# Altium PCB BordPCB.PcbDoc
Units mil, origin at the board's own origin, x right, y up, seen from the top; angles counter-clockwise.
Board outline 4737.04 x 3032.29 mil, 2 copper layers (Top Layer, Bottom Layer); 94 components, 112 nets, 442 pads, 0 vias.
Unrouted connection lines stored in the file: 265.
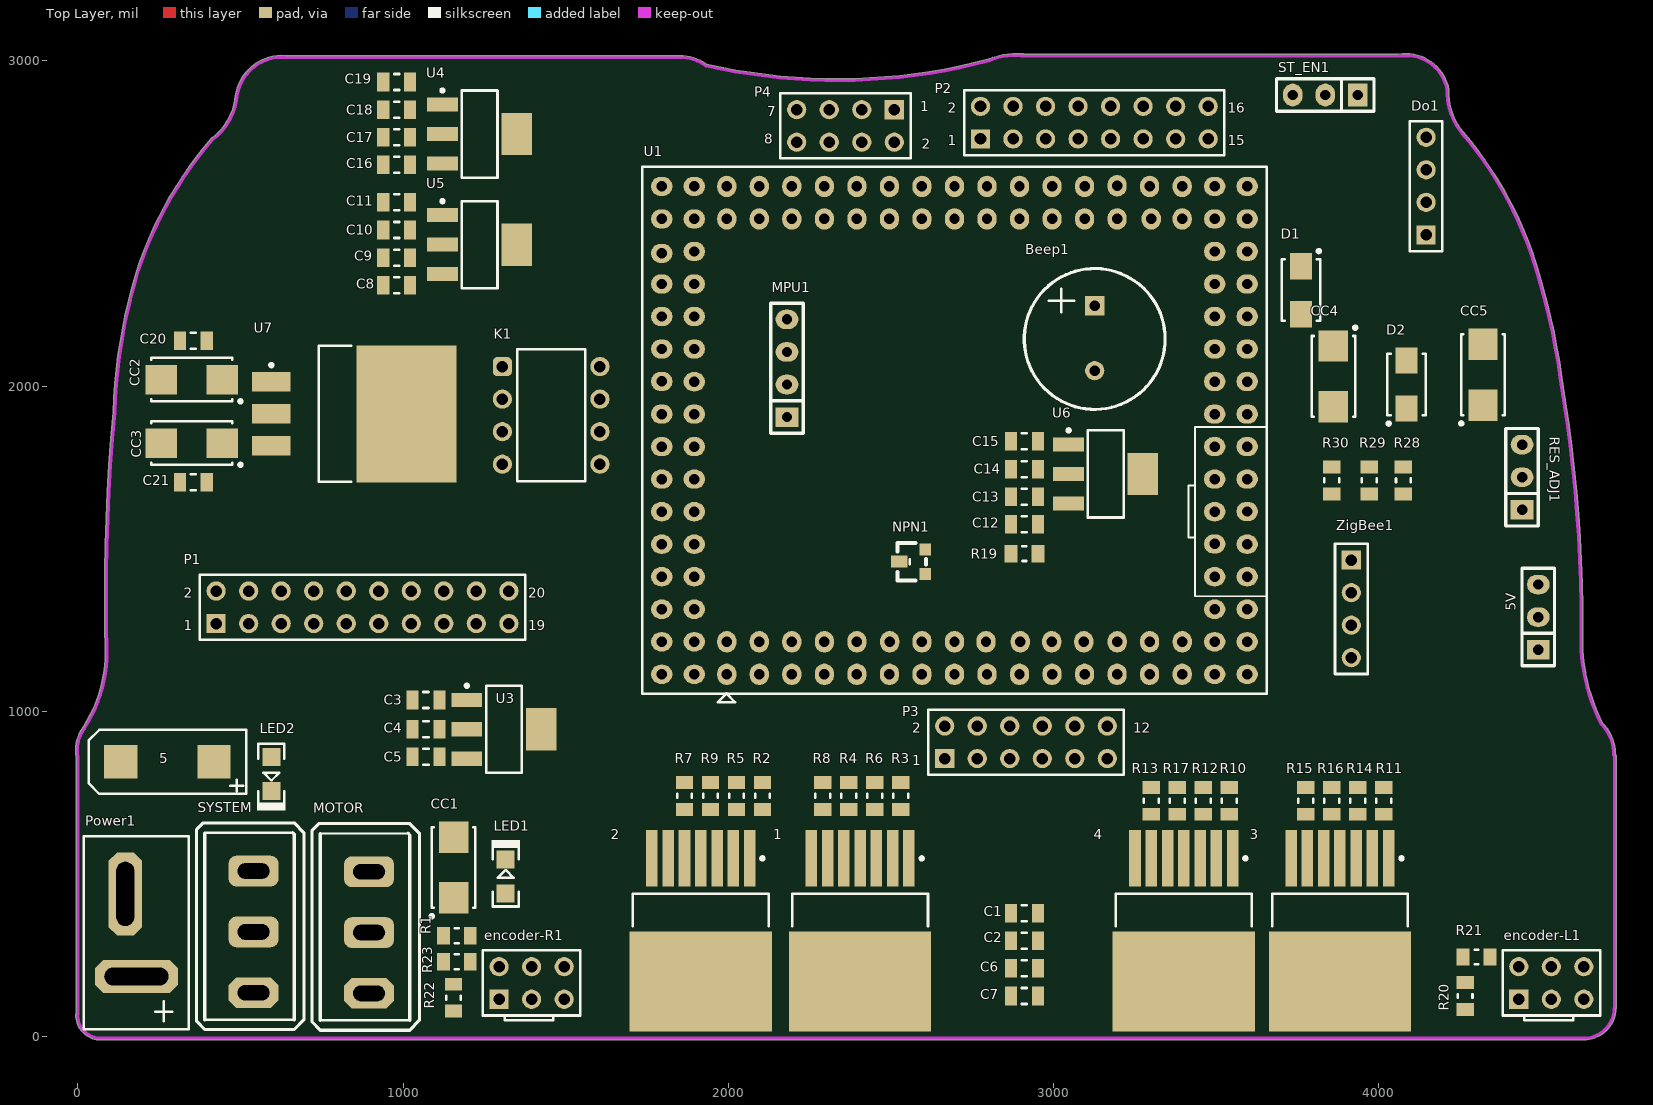
[diagram p0: Top Layer view]
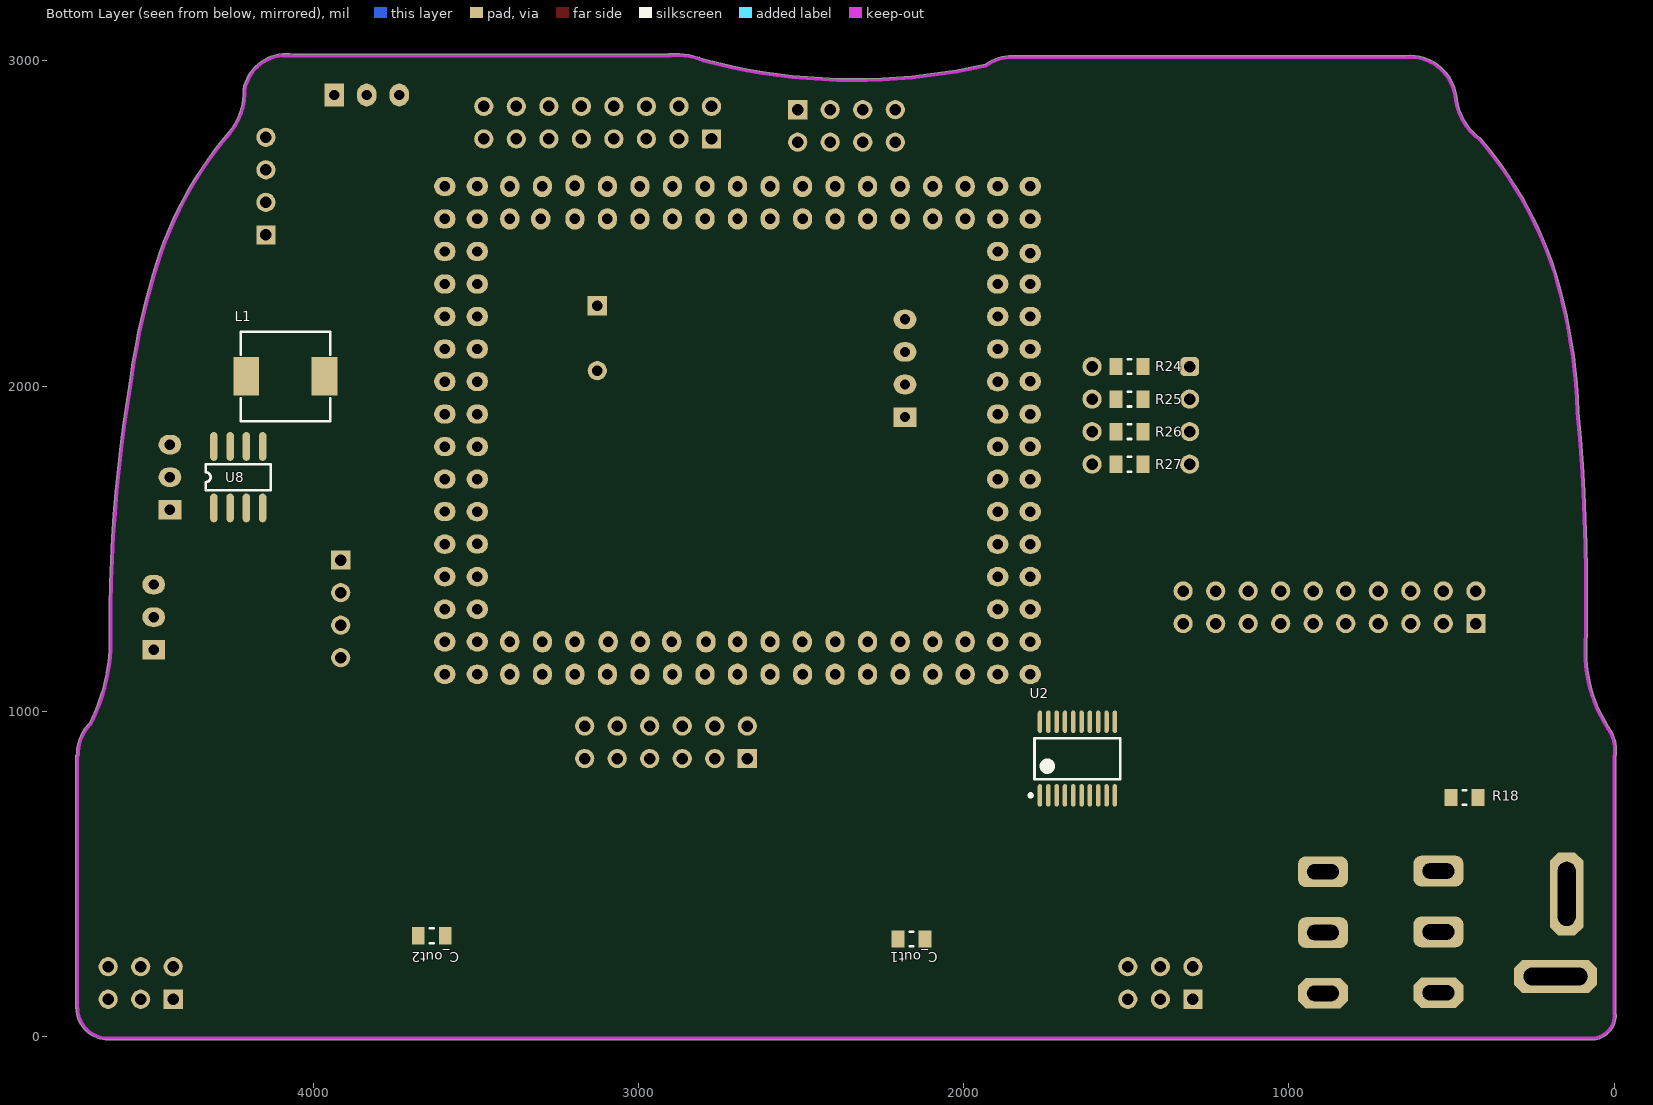
[diagram p1: Bottom Layer view, seen from below]

## Layer stack, top to bottom
Top Solder: solder mask 0.4, Solder Resist, Dk 3.5
Top Layer: signal copper 1.4
Dielectric 1: dielectric 12.6, FR-4, Dk 4.8
Bottom Layer: signal copper 1.4
Bottom Solder: solder mask 0.4, Solder Resist, Dk 3.5

## Board outline
-6.29,66.27 cw(c-1.27,66.27) -5.33,69.22 -5.33,859.52 cw(c115,880) 15,950 cw(c19.11,947.12) 15.98,951.04 ccw(c-348.3,1185.12) 84.71,1184.89 ccw(c-348.3,1185.12) 84.71,1184.96 84.71,1184.89 cw(c6354.82,1353.99) 107.98,1919.59 cw(c1810,1860) 178.76,2349.37 cw(c183.57,2347.93) 178.79,2349.47 cw(c1310,1985) 409.75,2760.9 cw(c413.55,2757.63) 410.58,2761.67 ccw(c300,2910) 484.18,2892.43 ccw(c300,2910) 484.18,2892.46 484.18,2892.43 cw(c489.17,2891.98) 484.22,2892.74 cw(c628.6,2870.58) 650.38,3015.01 1850.05,3015.01 cw(c1855,2885) 1932.28,2989.68 ccw(c2334.49,4768.1) 2798.37,3004.76 cw(c2885,2800) 2905.59,3021.37 cw(c2905.13,3016.38) 2908.58,3020.01 4059.56,3020.01 cw(c4082.5,2887.5) 4214.94,2910.87 cw(c4210,2910) 4215.02,2910 cw(c4210,2910) 4214.81,2908.57 ccw(c4410,2905) 4259.18,2781.03 ccw(c3380,2030) 4259.16,2781.07 4259.18,2781.03 cw(c3380,2030) 4492.37,2345.68 cw(c3380,2030) 4492.38,2345.63 4492.37,2345.68 cw(c2445,1730) 4562.25,2026.72 cw(c2445,1730) 4562.26,2026.65 4562.25,2026.72 cw(c-50,1250) 4627.19,1250 cw(c-50,1250) 4626.81,1189.93 ccw(c5185,1219.51) 4688.61,962.5 cw(c4595,870) 4726.6,870 cw(c4595,870) 4726.56,866.4 cw(c4725,861.63) 4730.02,861.63 4730.02,90 cw(c4725,90) 4728.19,86.13 cw(c4630,88.19) 4630,-10.01 70,-10.01 cw(c70,66.27)

## Design rules (kind name [scope] priority, off if disabled: settings)
Clearance [All] p1: gap=10 ignorepadtopadclearanceinfootprint=FALSE except(0: Arc-Hole Track-Hole SMDPad-Hole THPad-Hole Via-Hole Fill-Hole Poly-Hole Region-Hole Text-Hole)
PolygonConnect [All] p1: connectstyle=Relief reliefconductorwidth=10 reliefentries=4 polygonreliefangle="90 Angle" airgapwidth=10
RoutingVias [All] p1: holewidth=28 width=50 viastyle="Through Hole" minholewidth=28 minwidth=50 maxholewidth=28 maxwidth=50
SolderMaskExpansion [All] p1: expansion=4
Width [All] p1: maxlimit=10 minlimit=10 preferedwidth=10
30 further rules are at their usual default settings.

## Classes and differential pairs
net class PTB[19..0]: PTB0 PTB1 PTB2 PTB3 PTB4 PTB5 PTB6 PTB7 PTB8 PTB9 PTB10 PTB11 PTB16 PTB17 PTB18 PTB19
net class D[7..0]: D0 D1 D2 D3 D4 D5 D6 D7
component class U_ServoPower: CC4 CC5 D1 D2 L1 R28 R29 R30 RES_ADJ1 ST_EN1 U8
component class U_Select&Measure: encoder-L1 encoder-R1 K1 R20 R21 R22 R23 R24 R25 R26 R27
component class U_PowerGroup: 5 C8 C9 C10 C11 C12 C13 C14 C15 C16 C17 C18 C19 C20 C21 CC2 CC3 LED2 Power1 R18 R19 SYSTEM U4 U5 U6 U7
component class U_PowerDriver: 1 2 3 4 C1 C2 C3 C4 C5 C6 C7 C_out1 C_out2 CC1 LED1 MOTOR R1 R2 R3 R4 R5 R6 R7 R8 R9 R10 R11 R12 R13 R14 R15 R16 R17 U2 U3
component class U_Models: 5V Do1 MPU1 P3 P4 ZigBee1
component class U_MCU&Net: Beep1 NPN1 U1
component class U_Display&Key&Eye: P1 P2

## Components (designator, comment, footprint, x,y, rotation, side; value= is the part's Value field where it differs from the comment)
1 "BTS79xx" BTS79xx 2405,325.51 r270 top locked
2 "BTS79xx" BTS79xx 1915,325.51 r270 top locked
3 "BTS79xx" BTS79xx 3880,325.51 r270 top locked
4 "BTS79xx" BTS79xx 3400,325.51 r270 top locked
5 "钽电容" 钽D 275,845 r180 top locked
5V "Header3" Header3 4490,1290 r90 top locked (schematic designator BigEye1)
Beep1 "BEEP" BEEP 3130,2145 r0 top locked
C1 "10u" 0805电容 2910,380 r0 top locked
C2 "470n" 0805电容 2910,295 r180 top locked
C3 "100n" 0805电容 1070,1035 r180 top locked
C4 "10u" 0805电容 1070,945 r0 top locked
C5 "10u" 0805电容 1070,860 r180 top locked
C6 "10u" 0805电容 2910,210 r0 top locked
C7 "470n" 0805电容 2910,125 r180 top locked
C8 "10u" 0805电容 980,2310 r180 top locked
C9 "0.1u" 0805电容 980,2395 r180 top locked
C10 "10u" 0805电容 980,2480 r180 top locked
C11 "0.1u" 0805电容 980,2565 r180 top locked
C12 "10u" 0805电容 2910,1575 r180 top locked
C13 "0.1u" 0805电容 2910,1660 r180 top locked
C14 "10u" 0805电容 2910,1745 r180 top locked
C15 "0.1u" 0805电容 2910,1830 r180 top locked
C16 "10u" 0805电容 980,2680 r180 top locked
C17 "0.1u" 0805电容 980,2765 r180 top locked
C18 "10u" 0805电容 980,2850 r180 top locked
C19 "0.1u" 0805电容 980,2935 r180 top locked
C20 "0.1u" 0805电容 355,2140 r180 top locked
C21 "0.1u" 0805电容 355,1705 r180 top locked
C_out1 "0" 0805电阻 2160,300 r180 bottom locked
C_out2 "0" 0805电阻 3635,310 r180 bottom locked
CC1 "Cap Tan C" CAPMP6032X26N 1155,520 r90 top locked
CC2 "Cap Tan C" CAPMP6032X26N 350,2020 r180 top locked
CC3 "Cap Tan C" CAPMP6032X26N 350,1825 r180 top locked
CC4 "Cap Tan C" CAPMP6032X26N 3860,2030 r270 top locked
CC5 "Cap Tan C" CAPMP6032X26N 4320,2035 r90 top locked
D1 "贴片二极管" 二极管SMA 3760,2295 r270 top locked
D2 "贴片二极管" 二极管SMA 4085,2005 r90 top locked
Do1 "DoubleOut" HDR1X4 4145,2465 r90 top locked
encoder-L1 "编码器" 编码器 4530,165 r90 top locked
encoder-R1 "编码器" 编码器 1395,165 r90 top locked
K1 "拨码开关" 拨码开关 1455,1910 r0 top locked
L1 "33uh" 电感7.3X7.3 4085,2030 r180 bottom locked
LED1 "0805LED" 0805LED 1315,495 r90 top locked
LED2 "0805LED" 0805LED 595,805 r270 top locked
MOTOR "Power" PowerSW 895,320 r180 top locked (schematic designator PowerSW1)
MPU1 "Header4" Header4 2180,2055 r90 top locked
NPN1 "NPN" "三极管  NPN" 2565,1460 r90 top locked
P1 "DISP&KEY" HDR2X10 425,1270 r0 top locked
P2 "Camera" HDR2X8 2775,2760 r0 top locked
P3 "Header 6X2" HDR2X6 2665,855 r0 top locked
P4 "Header 4X2" HDR2X4 2510,2850 r180 top locked
Power1 "XT60" XT60 180,310 r90 top locked
R1 "4.7k" 0805电阻 1165,310 r0 top locked
R2 "10k" 0805电阻 2105,740 r270 top locked
R3 "10k" 0805电阻 2530,740 r270 top locked
R4 "510R" 0805电阻 2370,740 r270 top locked
R5 "10k" 0805电阻 2025,740 r270 top locked
R6 "10k" 0805电阻 2450,740 r270 top locked
R7 "1k" 0805电阻 1865,740 r270 top locked
R8 "1k" 0805电阻 2290,740 r270 top locked
R9 "510R" 0805电阻 1945,740 r270 top locked
R10 "10k" 0805电阻 3540,725 r270 top locked
R11 "10k" 0805电阻 4015,725 r270 top locked
R12 "10k" 0805电阻 3460,725 r270 top locked
R13 "1k" 0805电阻 3300,725 r270 top locked
R14 "10k" 0805电阻 3935,725 r270 top locked
R15 "1k" 0805电阻 3775,725 r270 top locked
R16 "510R" 0805电阻 3855,725 r270 top locked
R17 "510R" 0805电阻 3380,725 r270 top locked
R18 "2K" 0805电阻 460,735 r0 bottom locked
R19 "R0" 0805电阻 2910,1485 r180 top locked
R20 "1k" 0805电阻 4265,125 r270 top locked
R21 "1k" 0805电阻 4300,245 r180 top locked
R22 "1k" 0805电阻 1155,120 r270 top locked
R23 "1k" 0805电阻 1165,230 r180 top locked
R24 "2k" 0805电阻 1490,2060 r180 bottom locked
R25 "2k" 0805电阻 1490,1960 r180 bottom locked
R26 "2k" 0805电阻 1490,1860 r180 bottom locked
R27 "2k" 0805电阻 1490,1760 r180 bottom locked
R28 "1k" 0805电阻 4075,1710 r270 top locked
R29 "1k" 0805电阻 3970,1710 r270 top locked
R30 "2.7k" 0805电阻 3855,1710 r270 top locked
RES_ADJ1 "2k" Header3 4440,1720 r90 top locked
ST_EN1 "Header3" Header3 3835,2895 r180 top locked
SYSTEM "Power" PowerSW 540,322.01 r180 top locked (schematic designator PowerSW2)
U1 "K60FX 144" "K60FX 144" 2695,1865 r180 top locked
U2 "74Lvc245" TSOP65P650X110-20N 1650,855 r90 bottom locked
U3 "AMS1117-" AMS1117- 1310,945 r0 top locked
U4 "AMS1117-" AMS1117- 1235,2775 r0 top locked
U5 "AMS1117-" AMS1117- 1235,2435 r0 top locked
U6 "AMS1117-" AMS1117- 3160,1730 r0 top locked
U7 "LM2940" LM2940 854.49,1915 r0 top locked
U8 "AS1015" MC34063 4230,1720 r90 bottom locked
ZigBee1 "ZigBee" HDR1X4 3915,1465 r270 top locked

## Footprints (in the part's own frame and the unit in brackets; to place one, negate y for a bottom-side part, rotate by r counter-clockwise, add the part's x,y. Pads: shape width x height; smd on the part's side, far side on the other; paste and mask are expansions set on the pad)
0805LED [mil]
  rect 55x55 smd: 1(-55,0) 2(50,0)
  silkscreen extent -95,-44 110,44
0805电容 [mm]
  rect 0.95x1.45 smd: 1(-1.05,0) 2(1.05,0)
  silkscreen extent -0.2,-0.63 0.2,0.63, body extent -1.1,-0.7 1.1,0.7, height 0.5
0805电阻 [mm]
  rect 1x1.35 smd: 1(-1.05,0) 2(1.05,0)
  silkscreen extent -0.15,-0.58 0.15,0.58, body extent -1.1,-0.7 1.1,0.7, height 0.5
AMS1117- [mm]
  rect 2.4x1.1 smd: 1(-2.9,2.3) 2(-2.9,0) 3(-2.9,-2.3)
  rect 2.4x3.3 smd: 4(2.9,0)
  silkscreen extent -3.02,-3.4 1.4,3.52, body extent -1.86,-3.4 1.86,3.4, height 1.8
BEEP [mm]
  rect 1.5x1.5 hole 0.8: 1(-0.1,2.6)
  round 1.5 hole 0.8: 2(-0.1,-2.475)
  silkscreen extent -5.6,-5.5 5.4,5.5
BTS79xx [mm]
  rect 4.4x0.9 smd: 1(-5.65,3.81) 2(-5.65,2.54) 3(-5.65,1.27) 4(-5.65,0) 5(-5.65,-1.27) 6(-5.65,-2.54) 7(-5.65,-3.81)
  rect 7.8x11.1 smd: 8(3.95,0)
  silkscreen extent -5.77,-5.3 -0.35,5.3, body extent -2.9,-5.3 5.9,5.3, height 4.8
CAPMP6032X26N [mm] "Molded Capacitor, 2-Leads, Body 6.00x3.20mm, IPC Medium Density"
  rect 2.45x2.3 smd: 1(-2.375,0) 2(2.375,0)
  silkscreen extent -3.92,-1.7 3.15,1.82, body extent -3.1,-1.7 3.1,1.7, height 2.6
HDR1X4 [mm] "Connector; Header; 4 Position"
  rect 1.5x1.5 hole 0.9: 1(0,0)
  round 1.5 hole 0.9: 2(2.54,0) 3(5.08,0) 4(7.62,0)
  silkscreen extent -1.27,-1.27 8.89,1.27
HDR2X4 [mm] "Connector; Header; 4x2 Position"
  rect 1.5x1.5 hole 0.9: 1(0,0)
  round 1.5 hole 0.9: 2(0,2.54) 3(2.54,0) 4(2.54,2.54) 5(5.08,0) 6(5.08,2.54) 7(7.62,0) 8(7.62,2.54)
  silkscreen extent -1.27,-1.27 8.89,3.81
HDR2X6 [mm] "Connector; Header; 6x2 Position"
  rect 1.5x1.5 hole 0.9: 1(0,0)
  round 1.5 hole 0.9: 2(0,2.54) 3(2.54,0) 4(2.54,2.54) 5(5.08,0) 6(5.08,2.54) 7(7.62,0) 8(7.62,2.54) 9(10.16,0) 10(10.16,2.54) 11(12.7,0) 12(12.7,2.54)
  silkscreen extent -1.27,-1.27 13.97,3.81
HDR2X8 [mm] "Connector; Header; 8x2 Position"
  rect 1.5x1.5 hole 0.9: 1(0,0)
  round 1.5 hole 0.9: 2(0,2.54) 3(2.54,0) 4(2.54,2.54) 5(5.08,0) 6(5.08,2.54) 7(7.62,0) 8(7.62,2.54) 9(10.16,0) 10(10.16,2.54) 11(12.7,0) 12(12.7,2.54) 13(15.24,0) 14(15.24,2.54) 15(17.78,0) 16(17.78,2.54)
  silkscreen extent -1.27,-1.27 19.05,3.81
HDR2X10 [mm] "Connector; Header; 10x2 Position"
  rect 1.5x1.5 hole 0.9: 1(0,0)
  round 1.5 hole 0.9: 2(0,2.54) 3(2.54,0) 4(2.54,2.54) 5(5.08,0) 6(5.08,2.54) 7(7.62,0) 8(7.62,2.54) 9(10.16,0) 10(10.16,2.54) 11(12.7,0) 12(12.7,2.54) 13(15.24,0) 14(15.24,2.54) 15(17.78,0) 16(17.78,2.54) 17(20.32,0) 18(20.32,2.54) 19(22.86,0) 20(22.86,2.54)
  silkscreen extent -1.27,-1.27 24.13,3.81
Header3 [mil]
  rect 60x70 hole 32: 1(-100,0)
  oval 60x70 hole 32: 2(0,0) 3(100,0)
  silkscreen extent -150,-50 150,50
Header4 [mil]
  rect 60x70 hole 32: 1(-150,0)
  oval 60x70 hole 32: 2(-50,0) 3(50,0) 4(150,0)
  silkscreen extent -200,-50 200,50
"K60FX 144" [mil]
  oval 59x66 hole 32: 1(700,750.98) 2(700,650.98) 3(600,750.98) 4(600,650.98) 5(500,750.98) 6(500,650.98) 7(400,750.98) 8(400,650.98) 9(300,750.98) 10(300,650.98) 11(200,750.98) 12(199.21,650.98) 13(100,750.98) 14(100,650.98) 15(0,750.98) 16(0,650.98) 17(-100,750.98) 18(-96.85,650.98) 19(-200,750.98) 20(-202.36,650.98) 21(-300,750.98) 22(-298.82,650.98) 23(-400,750.98) 24(-397.64,650.98) 25(-500,750.98) 26(-500.39,650.98) 27(-600,750.98) 28(-600,650.98) 29(-700,750.98) 30(-700.39,650.98) 63(-700,-749.02) 64(-700,-649.02) 65(-600,-749.02) 66(-605,-649.02) 67(-500,-750.98) 68(-500,-649.02) 69(-400,-749.02) 70(-400,-649.02) 71(-300,-749.02) 72(-300,-649.02) 73(-200,-749.02) 74(-200,-649.02) 75(-100,-749.02) 76(-100,-649.02) 77(0,-749.02) 78(0,-649.02) 79(100,-749.02) 80(100,-649.02) 81(200,-749.02) 82(200,-649.02) 83(300,-749.02) 84(300,-649.02) 85(400,-749.02) 86(400,-649.02) 87(500,-749.02) 88(500,-649.02) 89(600,-749.02) 90(600,-649.02) 91(700,-749.02) 92(700,-649.02)
  oval 66x59 hole 32: 31(-800,750.98) 32(-900,750.98) 33(-800,650.98) 34(-900,650.98) 35(-800,550.98) 36(-900,550.98) 37(-800,450.98) 38(-900,450.98) 39(-800,350.2) 40(-900,350.98) 41(-800,250.98) 42(-900,250.59) 43(-800,150.98) 44(-900,150.98) 45(-800,50.98) 46(-900,50.98) 47(-800,-49.02) 48(-900,-49.02) 49(-800,-149.02) 50(-900,-149.02) 51(-800,-249.02) 52(-900,-249.02) 53(-800,-349.02) 54(-900,-349.02) 55(-800,-449.02) 56(-900,-449.02) 57(-800,-549.02) 58(-900,-549.02) 59(-800,-649.02) 60(-900,-649.02) 61(-800,-749.02) 62(-900,-749.02) 93(800,-749.02) 94(900,-749.02) 95(800,-649.02) 96(900,-649.02) 97(800,-549.02) 98(900,-543.11) 99(800,-449.02) 100(900,-449.02) 101(800,-349.02) 102(900,-349.02) 103(800,-249.02) 104(900,-249.02) 105(800,-148.62) 106(900,-149.41) 107(800,-49.02) 108(900,-49.02) 109(800,50.98) 110(900,50.98) 111(800,150.98) 112(900,150.98) 113(800,250.98) 114(900,250.98) 115(800,350.98) 116(900,350.98) 117(800,450.98) 118(900,450.98) 119(800,550.98) 120(900,550.98) 121(800,650.98) 122(900,650.98) 123(800,750.98) 124(900,750.98)
  silkscreen extent -960,-809 960,838
LM2940 [mm]
  rect 3x1.5 smd: 1(-6.6,2.5) 2(-6.6,0) 3(-6.6,-2.5)
  rect 7.8x10.7 smd: 4(3.95,0)
  silkscreen extent -6.72,-5.3 -0.35,5.3, body extent -2.9,-5.3 5.9,5.3, height 4.8
MC34063 [mm]
  oval 2.25x0.6 smd: 1(-2.4,1.905) 2(-2.4,0.635) 3(-2.4,-0.635) 4(-2.4,-1.905) 5(2.4,-1.905) 6(2.4,-0.635) 7(2.4,0.635) 8(2.4,1.905)
  silkscreen extent -1.02,-2.55 1.02,2.55
PowerSW [mm]
  oct 3.9x2.4 hole 1.2 slot 2.5 at 0 deg: 1(0,4.75)
  rrect50% 3.9x2.4 hole 1.2 slot 2.5 at 0 deg: 2(0,0) 3(0,-4.75)
  silkscreen extent -3.94,-8.51 4.45,7.62
TSOP65P650X110-20N [mm] "TSOP, 20-Leads, Body 6.55x4.40mm, Pitch 0.65mm, IPC Medium Density"
  oval 1.75x0.35 smd: 1(-2.875,2.925) 2(-2.875,2.275) 3(-2.875,1.625) 4(-2.875,0.975) 5(-2.875,0.325) 6(-2.875,-0.325) 7(-2.875,-0.975) 8(-2.875,-1.625) 9(-2.875,-2.275) 10(-2.875,-2.925) 11(2.875,-2.925) 12(2.875,-2.275) 13(2.875,-1.625) 14(2.875,-0.975) 15(2.875,-0.325) 16(2.875,0.325) 17(2.875,0.975) 18(2.875,1.625) 19(2.875,2.275) 20(2.875,2.925)
  silkscreen extent -3,-3.35 1.6,3.78, body extent -2.25,-3.35 2.25,3.35, height 1.1
XT60 [mm]
  oct 2.6x6.5 hole 1.4 slot 5 at 90 deg: 1(-3.175,0)
  oct 6.5x2.6 hole 1.4 slot 5 at 0 deg: 2(3.275,0.869)
  silkscreen extent -7.3,-4.08 7.78,4.12
"三极管  NPN" [mil]
  rect 36x50 smd: 1(0.5,40)
  rect 36x36 smd: 2(-37.5,-40) 3(37.5,-40)
  silkscreen extent -58,-42 58,45
二极管SMA [mm]
  rect 2.05x1.7 smd: 1(-1.875,0) 2(1.875,0)
  silkscreen extent -3.17,-1.5 2.4,1.53, body extent -2.4,-1.5 2.4,1.5, height 2.3
拨码开关 [mm]
  rrect50% 1.5x1.5 hole 0.9: 1(-3.81,3.81)
  round 1.5 hole 0.9: 2(-3.81,1.27) 3(-3.81,-1.27) 4(-3.81,-3.81) 5(3.81,-3.81) 6(3.81,-1.27) 7(3.81,1.27) 8(3.81,3.81)
  silkscreen extent -2.65,-5.15 2.65,5.15
电感7.3X7.3 [mm]
  rect 2x3 smd: 1(-3.048,0) 2(3.048,0)
  silkscreen extent -3.5,-3.5 3.5,3.5
编码器 [mm]
  rect 1.5x1.5 hole 0.9: 1(-1.27,2.54)
  round 1.5 hole 0.9: 2(1.27,2.54) 3(-1.27,0) 4(1.27,0) 5(-1.27,-2.54) 6(1.27,-2.54)
  silkscreen extent -2.9,-3.81 2.54,3.81
钽D [mm]
  rect 2.6x2.6 smd: 1(-3.65,0) 2(3.65,0)
  silkscreen extent -6.15,-2.5 6.15,2.5

## Part data
Beep1: library part 蜂鸣器
C1 C2 C3 C4 C5 C6 C7 C8 C9 C10 C11 C12 C13 C14 C15 C16 C17 C18 C19 C20 C21: library part 0805电容
C_out1 C_out2 R1 R2 R3 R4 R5 R6 R7 R8 R9 R10 R11 R12 R13 R14 R15 R16 R17 R18 R19 R20 R21 R22 R23 R24 R25 R26 R27 R28 R29 R30: library part 0805电阻
CC1: "Polarized Capacitor (Radial)", Capacitance=105, Voltage=16V, Published=8-Jun-2000, Publisher="Altium Limited", Revision="July-2002: Re-released for DXP Platform."
CC2 CC3: "Polarized Capacitor (Radial)", Capacitance=47u, Voltage=16V, Published=8-Jun-2000, Publisher="Altium Limited", Revision="July-2002: Re-released for DXP Platform."
CC4 CC5: "Polarized Capacitor (Radial)", Capacitance=220u, Voltage=16V, Published=8-Jun-2000, Publisher="Altium Limited", Revision="July-2002: Re-released for DXP Platform."
Do1 ZigBee1: library part "Header 4", "Header, 4-Pin", LatestRevisionDate=17-Jul-2002, LatestRevisionNote="Re-released for DXP Platform.", Publisher="Altium Limited"
L1: library part 电感
MOTOR SYSTEM: library part PowerSW, =SW
P1: library part "Header 10X2", "Header, 10-Pin, Dual row", LatestRevisionDate=17-Jul-2002, LatestRevisionNote="Re-released for DXP Platform.", Publisher="Altium Limited"
P2: library part "Header 8X2", "Header, 8-Pin, Dual row", LatestRevisionDate=17-Jul-2002, LatestRevisionNote="Re-released for DXP Platform.", Publisher="Altium Limited"
P3: "Header, 6-Pin, Dual row", LatestRevisionDate=17-Jul-2002, LatestRevisionNote="Re-released for DXP Platform.", Publisher="Altium Limited"
P4: "Header, 4-Pin, Dual row", LatestRevisionDate=17-Jul-2002, LatestRevisionNote="Re-released for DXP Platform.", Publisher="Altium Limited"
RES_ADJ1: library part Header3
U1: library part "K60FX   144"
U2: library part 74LVC245
U8: library part MC34063
Power1: =*

## Nets (pads, with @x,y where several pads share a name; then routed paths per layer and width w, separated by ;. In a path a pad name is that pad's centre, name@x,y a point inside that pad or via, vN(x,y) a via of type N, cw(c..) or ccw(c..) an arc to the next point about the centre after c; other vN are vias at no path point)
3V3Dir: C3.1 C4.2 C5.1 U2.20 U3.2
3V3MCU: C14.1 C15.1
5V0: 5V.2 5V.3 C21.1 CC3.1 Do1.4 U7.3
ADC0-DM1: P3.2 U1.18
ADC0-DM3: P3.8 U1.24
ADC0-DP1: P3.1 U1.17
ADC0-DP3: P3.7 U1.23
ADC1-DM3: P3.6 U1.22
ADC1-DP1: P3.3 U1.19
ADC1-DP3: P3.5 U1.21
ADC1-SE16: P3.9 U1.26
ADC1-SE18: P3.11 U1.28
BEEP: NPN1.2 U1.13
BigEye_L: P3.10 U1.27
BigEye_R: P3.4 U1.20
CAM_PCLK: P2.16 U1.65
CAM_SCL: P2.12 U1.66
CAM_SDA: P2.10 U1.63
CAM_VSYNC: P2.6 U1.67
Center: P1.2 U1.120
CS: P1.17 U1.99
D0: P1.20 U1.90
D1: P1.18 U1.89
D2: P1.16 U1.92
D3: P1.14 U1.91
D4: P1.12 U1.94
D5: P1.10 U1.93
D6: P1.8 U1.96
D7: P1.6 U1.95
DGND: P2.4 P2.14 R19.1 U1.41 U1.43
DIR1: encoder-L1.4 R21.1 U1.56
DIR2: encoder-R1.4 R23.1 U1.85
DirOut1: 2.4 2.8 C_out1.2
DirOut2: 1.4 1.8 C_out1.1
DirOut3: 4.4 4.8 C_out2.2
DirOut4: 3.4 3.8 C_out2.1
DoubleDI: Do1.1 U1.59
DoubleDO: Do1.2 U1.60
Down: P1.4 U1.119
GND: 1.1 2.1 3.1 4.1 5.2 5V.1 Beep1.1 C1.1 C2.2 C3.2 C4.1 C6.1 C7.2 C8.2 C9.2 C10.2 C11.2 C12.2 C13.2 C14.2 C15.2 C16.2 C17.2 C18.2 C19.2 C20.2 C21.2 CC1.2 CC2.2 CC3.2 CC4.1 CC5.1 D2.2 Do1.3 encoder-L1.1 encoder-R1.1 K1.1 K1.2 K1.3 K1.4 LED1.2 MPU1.3 P1.1 P3.12 Power1.2 R4.1 R7.1 R8.1 R9.1 R13.1 R15.1 R16.1 R17.1 R18.1 R19.2 RES_ADJ1.2 ST_EN1.1 U2.1 U2.6 U2.7 U2.8 U2.9 U2.10 U2.11 U2.12 U2.13 U2.14 U2.19 U3.1 U4.1 U5.1 U6.1 U7.2 U8.7 U8.8 ZigBee1.4
GyrSCL: MPU1.2 U1.118
GyrSDA: MPU1.1 U1.117
K1: K1.8 R24.1 U1.110
K2: K1.7 R25.1 U1.109
K3: K1.6 R26.1 U1.112
K4: K1.5 R27.1 U1.111
Left: P1.7 U1.122
LSB1: encoder-L1.3 R20.2 U1.55
LSB2: encoder-R1.3 R22.2 U1.62
MCU3V3: MPU1.4 U1.45 U6.2 ZigBee1.1
Net1_2: 1.2 R3.2
Net1_3: 1.3 R6.2
Net1_5: 1.5 R4.2
Net1_6: 1.6 R8.2
Net2_2: 2.2 R2.2
Net2_3: 2.3 R5.2
Net2_5: 2.5 R9.2
Net2_6: 2.6 R7.2
Net3_2: 3.2 R11.2
Net3_3: 3.3 R14.2
Net3_5: 3.5 R16.2
Net3_6: 3.6 R15.2
Net4_2: 4.2 R10.2
Net4_3: 4.3 R12.2
Net4_5: 4.5 R17.2
Net4_6: 4.6 R13.2
NetBeep1_2: Beep1.2 NPN1.3
NetD1_1: D1.1 ST_EN1.3
NetD2_1: D2.1 L1.1 U8.5 U8.6
NetLED1_1: LED1.1 R1.2
NetLED2_2: LED2.2 R18.2
NetR28_2: R28.2 RES_ADJ1.1 U8.1
NetR29_2: R29.2 U8.2
NetR30_2: R30.2 U8.3
Out1-3V3: C18.1 C19.1 encoder-L1.2 encoder-R1.2 P2.2 R20.1 R21.2 R22.1 R23.2 U4.2
Out2-3V3: C10.1 C11.1 P1.19 R24.2 R25.2 R26.2 R27.2 U5.2
PTB0: P2.15 U1.70
PTB1: P2.13 U1.69
PTB2: P2.11 U1.72
PTB3: P2.9 U1.71
PTB4: P2.7 U1.74
PTB5: P2.5 U1.73
PTB6: P2.3 U1.76
PTB7: P2.1 U1.75
PTB8: P4.1 U1.78
PTB9: P4.3 U1.77
PTB10: P4.5 U1.80
PTB11: P4.7 U1.79
PTB16: P4.2 U1.82
PTB17: P4.4 U1.81
PTB18: P4.6 U1.84
PTB19: P4.8 U1.83
PWM-L1: U1.6 U2.18
PWM-L2: U1.7 U2.17
PWM-R1: U1.8 U2.16
PWM-R2: U1.9 U2.15
PWM_OUT_1: R2.1 U2.2
PWM_OUT_2: R3.1 U2.3
PWM_OUT_3: R10.1 U2.4
PWM_OUT_4: R11.1 U2.5
R\S\: P1.9 U1.102
RD: P1.3 U1.100
Right: P1.11 U1.124
RST: P1.15 U1.101
SERVO: D1.2 U1.54
ST_EN_POWER: CC5.2 L1.2 R28.1 ST_EN1.2
Up: P1.5 U1.121
VBasic: 5.1 MOTOR.1 Power1.1 SYSTEM.1
VBAT: 1.7 2.7 3.7 4.7 C1.2 C2.1 C5.2 C6.2 C7.1 C8.1 C9.1 C12.1 C13.1 C16.1 C17.1 C20.1 CC1.1 CC2.1 CC4.2 LED2.1 MOTOR.2 NPN1.1 R1.1 R5.1 R6.1 R12.1 R14.1 R29.1 R30.1 SYSTEM.2 U3.3 U4.3 U5.3 U6.3 U7.1 U8.4
WR: P1.13 U1.97
ZigBee_RX_T: U1.32 ZigBee1.3
ZigBee_TX_R: U1.33 ZigBee1.2
pads on no net: encoder-L1.5 encoder-L1.6 encoder-R1.5 encoder-R1.6 MOTOR.3 P2.8 RES_ADJ1.3 SYSTEM.3 U1.1 U1.2 U1.3 U1.4 U1.5 U1.10 U1.11 U1.12 U1.14 U1.15 U1.16 U1.25 U1.29 U1.30 U1.31 U1.34 U1.35 U1.36 U1.37 U1.38 U1.39 U1.40 U1.42 U1.44 U1.46 U1.47 U1.48 U1.49 U1.50 U1.51 U1.52 U1.53 U1.57 U1.58 U1.61 U1.64 U1.68 U1.86 U1.87 U1.88 U1.98 U1.103 U1.104 U1.105 U1.106 U1.107 U1.108 U1.113 U1.114 U1.115 U1.116 U1.123 U3.4 U4.4 U5.4 U6.4 U7.4

## Keep-outs
Keep-Out Layer:
  lines w10: -1.27,66.27 ccw(c70,66.27) 70,-5 3090,-5 4630,-5 ccw(c4630,88.19) 4723.19,88.19 ; -0.32,66.27 -0.32,859.94 cw(c115,880) 19.11,947.12 ; 19.33,946.98 ccw(c-348.3,1185.12) 89.72,1184.96 ; 89.72,1184.9 cw(c6354.82,1353.99) 112.99,1919.28 cw(c1810,1860) 183.57,2347.93 cw(c1310,1985) 413.55,2757.63 ccw(c300,2910) 489.17,2891.98 cw(c628.6,2870.58) 650,3010 ; 610,3010 1850.14,3010 cw(c1855,2885) 1930.45,2984.78 ; 1930.56,2984.92 ccw(c2334.49,4768.1) 2800,3000 cw(c2885,2800) 2905.13,3016.38 ; 2900.11,3015 4095,3015 ; 4060,3015 cw(c4082.5,2887.5) 4210,2910 ; 4209.82,2910 ccw(c4410,2905) 4255.34,2777.81 cw(c3380,2030) 4487.56,2344.27 cw(c2445,1730) 4557.29,2025.96 cw(c-50,1250) 4621.79,1189.82 ; 4621.79,1189.84 ccw(c5185,1219.51) 4684.51,959.51 cw(c4595,870) 4721.5,865.13 ; 4725,90 4725,861.63

## Text inside footprints (layer, text, board x,y; h text height)
P1: Top Overlay "20" at 1385,1350 h30; Top Overlay "19" at 1385,1250 h30; Top Overlay "1" at 325,1250 h30; Top Overlay "2" at 325,1350 h30
P2: Top Overlay "2" at 2675,2840 h30; Top Overlay "1" at 2675,2740 h30; Top Overlay "15" at 3535,2740 h30; Top Overlay "16" at 3535,2840 h30
P3: Top Overlay "12" at 3245,935 h30; Top Overlay "1" at 2565,835 h30; Top Overlay "2" at 2565,935 h30
P4: Top Overlay "2" at 2595,2730 h30; Top Overlay "1" at 2590,2845 h30; Top Overlay "7" at 2120,2830 h30; Top Overlay "8" at 2110,2745 h30